# Altium PCB VIGIA_2_3.PcbDoc
Units mm, origin at the board's own origin, x right, y up, seen from the top; angles counter-clockwise.
Board outline 27 x 37 mm, 2 copper layers (Top Layer, Bottom Layer); 21 components, 24 nets, 82 pads, 0 vias.
Unrouted connection lines stored in the file: 2.
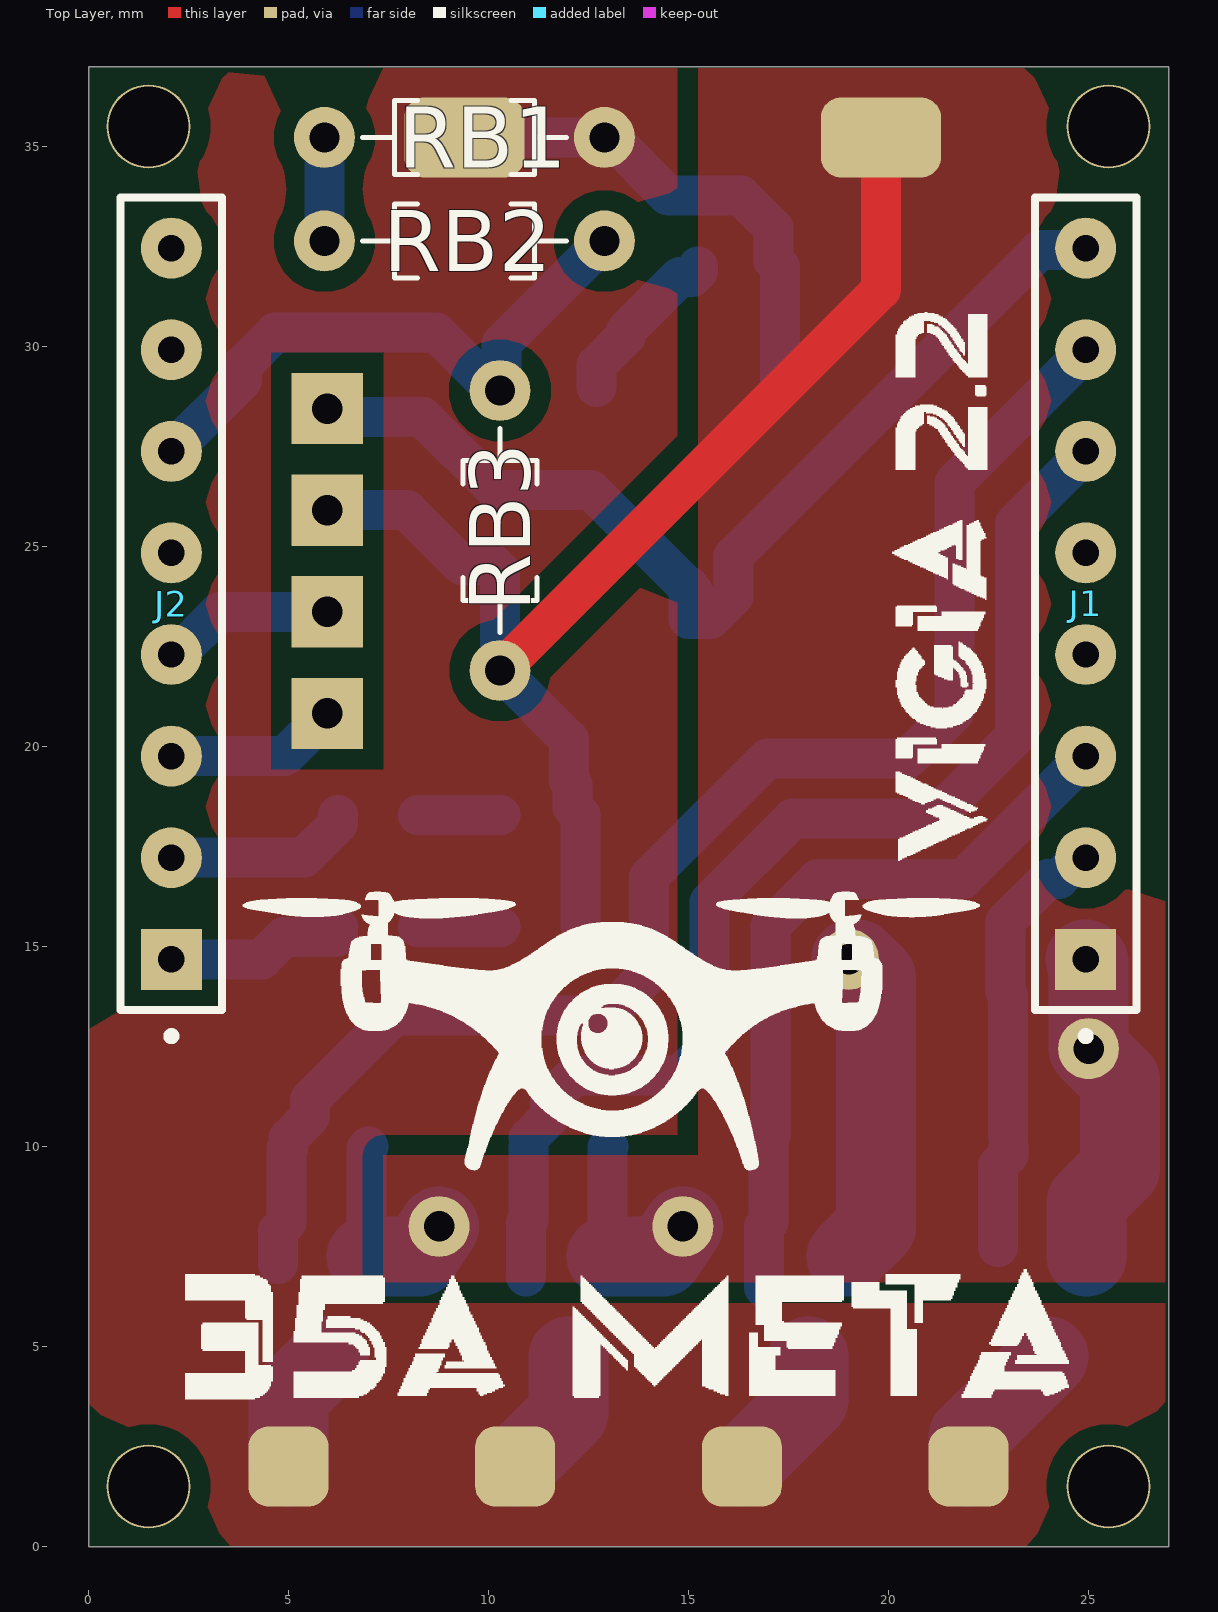
[diagram p0: Top Layer view]
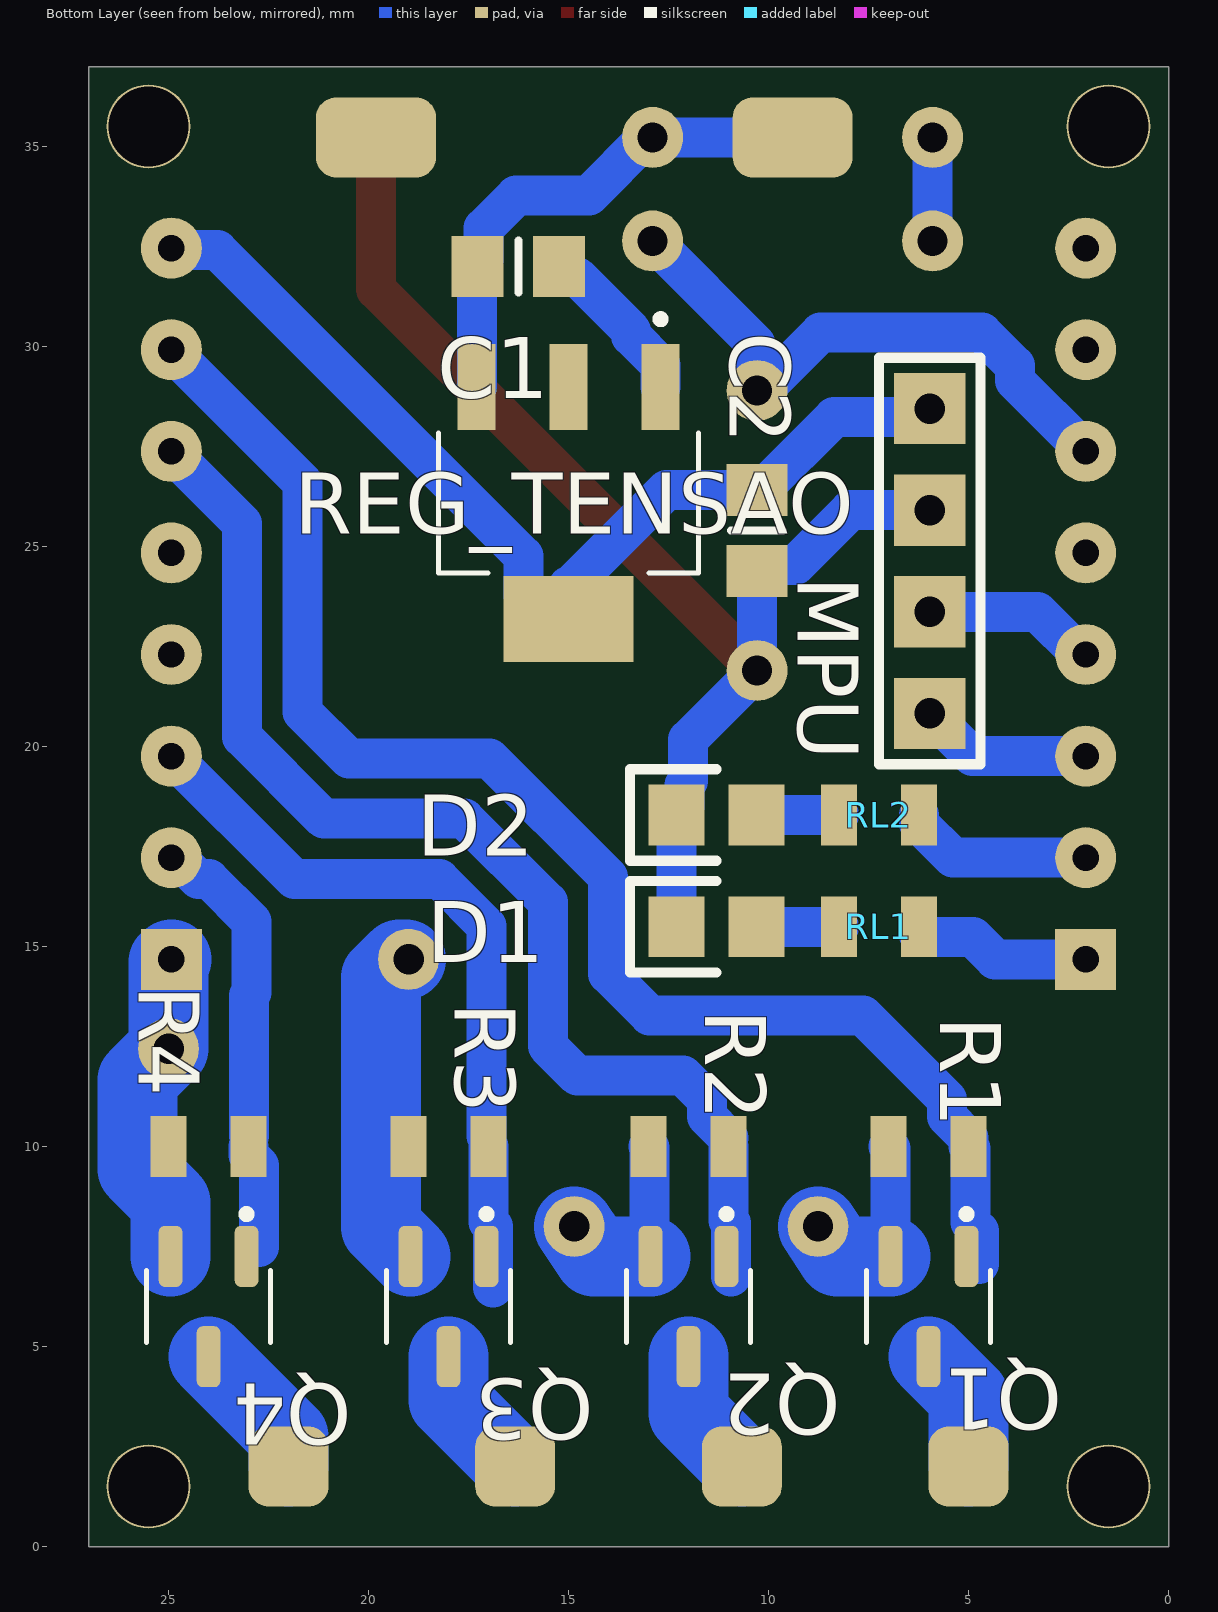
[diagram p1: Bottom Layer view, seen from below]

## Layer stack, top to bottom
Top Solder: solder mask 0.0102, Solder Resist, Dk 3.5
Top Layer: signal copper 0.0356
Dielectric 1: dielectric 0.32, FR-4, Dk 4.8
Bottom Layer: signal copper 0.0356
Bottom Solder: solder mask 0.0102, Solder Resist, Dk 3.5

## Board outline
0,0 0,37 27,37 27,0

## Design rules (kind name [scope] priority, off if disabled: settings)
Clearance [All] p1: gap=0.508 ignorepadtopadclearanceinfootprint=FALSE
PlaneConnect [All] p1: planeconnectstyle=Direct reliefexpansion=0.508 reliefentries=4 reliefconductorwidth=0.254 reliefairgap=0.254
PolygonConnect [All] p1: connectstyle=Direct reliefconductorwidth=0.254 reliefentries=4 polygonreliefangle="90 Angle" airgapwidth=0.254
RoutingVias [All] p1: holewidth=0.711 width=1.27 viastyle="Through Hole" minholewidth=0.711 minwidth=1.27 maxholewidth=0.711 maxwidth=1.27
SolderMaskExpansion [All] p1: expansion=0.102 istentingtop=FALSE
SupplyNets "Schematic Supply Nets" [InNet('GND')] p1: voltage=0.000
Width [All] p1: maxlimit=3 minlimit=1 preferedwidth=2 minimp=50.000000 maximp=50.000000 favimp=50.000000
29 further rules are at their usual default settings.

## Components (designator, comment, footprint, x,y, rotation, side; value= is the part's Value field where it differs from the comment)
C1 "CAP" "CAP 0805" 16.256,32.004 r0 bottom
C2 "CAP" "CAP 0805" 10.287,25.4 r90 bottom
D1 "DBGLED1" "LED 0805" 11.303,15.494 r0 bottom
D2 "DBGLED2" "LED 0805" 11.303,18.288 r0 bottom
J1 "GESP1" SAMTEC_SS-108-T-2 24.93,14.68 r270 top
J2 "GESP2" SAMTEC_SS-108-T-2 2.07,14.68 r270 top
MPU "CONECTOR_4PIN" CON4 5.969,28.448 r270 bottom (schematic designator MPU_6050)
Q1 "AO3400A" SOT95P280X125-3N 6,6 r270 bottom
Q2 "AO3400A" SOT95P280X125-3N 12,6 r270 bottom
Q3 "AO3400A" SOT95P280X125-3N 18,6 r270 bottom
Q4 "AO3400A" SOT95P280X125-3N 24,6 r270 bottom
R1 "RESISTOR" "RES 0805" 6,10 r180 bottom value=10k
R2 "RESISTOR" "RES 0805" 12,10 r180 bottom value=10k
R3 "RESISTOR" "RES 0805" 18,10 r180 bottom value=10k
R4 "RESISTOR" "RES 0805" 24,10 r180 bottom value=10k
RB1 "820K" RESAD700W45L350D185 9.398,35.227 r0 top
RB2 "82 Ohms" RESAD700W45L350D185 9.398,32.639 r0 top
RB3 "3M3" RESAD700W45L350D185 10.287,25.4 r90 top
REG_TENSAO "TLV1117LV33" VREG_TLV1117LV33DCYR 15,26.083 r270 bottom
RL1 "RESISTOR" "RES 0805" 7.239,15.494 r0 bottom value=100
RL2 "RESISTOR" "RES 0805" 7.239,18.288 r0 bottom value=100

## Footprints (in the part's own frame and the unit in brackets; to place one, negate y for a bottom-side part, rotate by r counter-clockwise, add the part's x,y. Pads: shape width x height; smd on the part's side, far side on the other; paste and mask are expansions set on the pad)
"CAP 0805" [mil] "0805"
  rect 51.18x60 smd: 1(-40,0) 2(40,0)
  silkscreen extent 0,-26 0,26, body extent -41,-24 38,23, height 35
CON4 [mil]
  rect 70x70 hole 30: 1(0,0) 2(100,0) 3(200,0) 4(300,0)
  silkscreen extent -50,-50 350,50, body extent -50,-47 343,45, height 519
"LED 0805" [mm] "0805"
  rect 1.4x1.524 smd: 1(-1,0) 2(1,0)
  silkscreen extent 0,-1.14 2.16,1.14, body extent -1.03,-0.4 1.03,0.51, height 0.85
"RES 0805" [mm] "0805 (1/8W)"
  rect 0.9x1.524 smd: 1(-1,0) 2(1,0)
  body extent -1.02,-0.63 0.95,0.6, height 0.48
RESAD700W45L350D185 [mm]
  round 1.524 hole 0.75: 1(-3.5,0) 2(3.5,0)
  silkscreen extent -2.55,-0.92 2.55,0.92, body extent -3.72,-0.92 3.72,0.92, height 1.84
SAMTEC_SS-108-T-2 [mil]
  rect 60x60 hole 25.98: 01(0,0)
  round 60 hole 25.98: 02(-100,0) 03(-200,0) 04(-300,0) 05(-400,0) 06(-500,0) 07(-600,0) 08(-700,0)
  silkscreen extent -750,-50 80,50
SOT95P280X125-3N [mm]
  rrect50% 1.524x0.59 smd: 1(-1.255,0.95) 2(-1.255,-0.95) 3(1.255,0)
  silkscreen extent -2.41,-1.55 0.9,1.55, body extent -1.4,-1.45 1.4,1.45, height 1.25
VREG_TLV1117LV33DCYR [mm]
  rect 2.15x0.95 smd: 1(-2.9,2.3) 2(-2.9,0) 3(-2.9,-2.3)
  rect 2.15x3.25 smd: 4(2.9,0)
  silkscreen extent -4.7,-3.25 1.75,3.25, body extent -3.5,-3.25 3.5,3.25, height 1.8

## Part data
C1 C2: library part "CAP. CERÂMICO", "Capacitor", Criado em=26/06/2012, Criador por="Luigi Eduardo", Pertence a=Trincabotz, Valor=10nF
D1 D2: library part LED
J1 J2: library part SS-108-T-2, "SS Series .100 Single Row Screw Machine Socket Strip", Package=None, Availability=Bad, MF=Samtec, MP=SS-108-T-2, Price=None, SnapEDA_Link=https://www.snapeda.com/parts/SS-108-T-2/Samtec/view-part/3323909/?ref=snap
  J2: Check_prices=SLA
Q1 Q2 Q3 Q4: "N-Channel 30 V 5.7A (Ta) 1.4W (Ta) Surface Mount SOT-23-3", Package="SOT-23 Alpha &amp; Omega Semiconductor Inc.", Check_prices=https://www.snapeda.com/parts/AO3400A/Alpha/view-part/?ref=eda, MF="Alpha & Omega Semiconductor", MP=AO3400A, SnapEDA_Link=https://www.snapeda.com/parts/AO3400A/Alpha/view-part/?ref=snap
R1 R2 R3 R4 RL1 RL2: "Resistor"
RB1 RB2 RB3: library part 3-1623927-1, "1 MOhms Â±5% 0.25W, 1/4W Through Hole Resistor Axial - Carbon Film", Package=None, Check_prices=https://www.snapeda.com/parts/3-1623927-1/TE+Connectivity/view-part/?ref=eda, MF="TE Connectivity", MP=3-1623927-1, SnapEDA_Link=https://www.snapeda.com/parts/3-1623927-1/TE+Connectivity/view-part/?ref=snap
REG_TENSAO: library part TLV1117LV33DCYR, "1-A, low-dropout voltage regulator", Package="SOT-223-4 Texas Instruments", Check_prices=https://www.snapeda.com/parts/TLV1117LV33DCYR/Texas+Instruments/view-part/?ref=eda, MF="Texas Instruments", MP=TLV1117LV33DCYR, SnapEDA_Link=https://www.snapeda.com/parts/TLV1117LV33DCYR/Texas+Instruments/view-part/?ref=snap

## Free pads (board coordinates)
  round 2.1 hole 2: 7(25.5,1.5) 8(1.5,1.5) 9(25.5,35.5) 10(1.5,35.5)
  rrect50% 2x2 smd far side: 11(5,2) 11(10.667,2) 11(16.333,2) 11(22,2)
  rrect50% 2x2 smd: 11(5,2) 11(10.667,2) 11(16.333,2) 11(22,2)
  rrect50% 3x2 smd far side: 12(19.812,35.227) 13(9.398,35.227)
  rrect50% 3x2 smd: 12(19.812,35.227) 13(9.398,35.227)
  round 1.524 hole 0.762: 17(14.859,8.001) 19(19,14.68) 20(25,12.446) 22(8.763,8.001)

## Nets (pads, with @x,y where several pads share a name; then routed paths per layer and width w, separated by ;. In a path a pad name is that pad's centre, name@x,y a point inside that pad or via, vN(x,y) a via of type N, cw(c..) or ccw(c..) an arc to the next point about the centre after c; other vN are vias at no path point)
3.3V: C2.2 J1.08 MPU.1 REG_TENSAO.4 | length 26.3
  Bottom Layer w1: MPU.1 6.184,28.233 8.358,28.233 10.175,26.416 C2.2 12.549,26.416 15.131,23.834 REG_TENSAO.4@15.131,23.758 ; REG_TENSAO.4@15,24.017 REG_TENSAO.4 15.55,23.183 16.125,23.758 16.125,24.761 23.778,32.414 24.884,32.414 J1.08
CTRLM1: J1.07 Q1.1 R1.2 | length 36.4
  Bottom Layer w1: 4.742,7.058 4.742,7.887 4.95,8.095 4.95,9.95 R1.2 5,10.212 5.542,10.754 5.542,11.18 7.64,13.278 12.975,13.278 14.011,14.314 14.011,16.738 16.977,19.704 20.492,19.704 21.652,20.864 21.652,26.605 24.93,29.883 J1.07
CTRLM2: J1.06 Q2.1 R2.2 | length 29.8
  Bottom Layer w1: Q2.1@10.942,6.753 10.942,8.087 11,8.145 R2.2 ; R2.2@11,10.212 11.542,10.754 11.542,11.18 12.132,11.77 14.781,11.77 15.519,12.508 15.519,16.113 17.602,18.196 21.117,18.196 23.16,20.239 23.16,25.573 24.93,27.343 J1.06
CTRLM3: J1.03 Q3.1 R3.2 | length 18.5
  Bottom Layer w1: 16.891,6.477 16.891,8.001 17,8.11 R3.2 ; R3.2@17.05,10.262 17.05,15.512 18.226,16.688 21.856,16.688 24.928,19.76 J1.03
CTRLM4: J1.02 Q4.1 R4.2 | length 10.7
  Bottom Layer w1: 22.733,7.493 22.733,9.521 23,9.788 R4.2 ; R4.2@22.992,10.262 22.992,13.778 22.922,13.848 22.922,15.622 23.988,16.688 24.256,16.688 24.788,17.22 J1.02
GND: C1.1 C2.1 D1.2 D2.2 J1.01 MPU.2 pad.12 pad.17 pad.19 pad.20 pad.22 Q1.2 Q2.2 Q3.2 Q4.2 R1.1 R2.1 R3.1 R4.1 RB3.1 REG_TENSAO.1 | length 62.5
  Top Layer w1: RB3.1 19.812,31.425 pad.12@19.812,35.227
  Bottom Layer w1: MPU.2 7.957,25.908 9.331,24.534 10.137,24.534 C2.1 RB3.1 12.011,20.176 12.011,19.136 12.103,19.044 12.103,18.488 D2.2 D1.2 ; Q1.2 6.95,9.517 6.95,9.95 R1.1 ; REG_TENSAO.1 12.7,29.533 13.432,30.265 13.432,30.391 14.783,31.742 15.09,31.742 15.24,31.892 C1.1 ; Q2.2 12.975,7.28 12.975,9.975 R2.1
  Bottom Layer w2: Q1.2 8.271,7.255 pad.22 ; Q2.2 14.367,7.255 pad.17 ; Q3.2 19.685,7.99 19.685,14.224 19.229,14.68 pad.19@19.058,14.68 ; J1.01 25,14.61 pad.20 25.781,11.665 25.781,9.436 24.95,8.605 Q4.2
LEDDBG1: J2.01 RL1.1 | length 4.6
  Bottom Layer w1: J2.01 4.332,14.68 4.884,15.232 6.189,15.232 6.239,15.282 RL1.1
LEDDBG2: J2.02 RL2.1 | length 4.7
  Bottom Layer w1: J2.02 5.383,17.22 6.239,18.076 RL2.1
MBAT: J2.06 RB2.2 RB3.2 | length 15.1
  Bottom Layer w1: J2.06 3.84,29.15 3.84,29.523 4.662,30.345 8.7,30.345 10.145,28.9 RB3.2 10.322,28.935 10.322,30.063 RB2.2
NetD1_1: D1.1 RL1.2 | length 2.1
  Bottom Layer w1: RL1.2 D1.1
NetD2_1: D2.1 RL2.2 | length 2.1
  Bottom Layer w1: RL2.2 D2.1
NetJ1_04: J1.04
NetJ1_05: J1.05
NetJ2_05: J2.05
NetJ2_07: J2.07
NetJ2_08: J2.08
NetM1_1: pad.11@5,2 Q1.3 | length 3.2
  Bottom Layer w2: pad.11@5,2 5,3.745 Q1.3
NetM2_1: pad.11@10.667,2 Q2.3 | length 3.3
  Bottom Layer w2: pad.11@10.667,2 12,3.333 Q2.3
NetM3_1: pad.11@16.333,2 Q3.3 | length 3.4
  Bottom Layer w2: pad.11@16.333,2 18,3.667 Q3.3
NetM4_1: pad.11@22,2 Q4.3 | length 3.6
  Bottom Layer w2: pad.11@22,2 22,2.745 Q4.3
NetRB1_1: RB1.1 RB2.1 | length 2.6
  Bottom Layer w1: RB2.1 RB1.1
SCL: J2.04 MPU.3 | length 4.3
  Bottom Layer w1: J2.04 2.212,22.3 3.28,23.368 MPU.3
SDA: J2.03 MPU.4 | length 4.3
  Bottom Layer w1: J2.03 4.901,19.76 MPU.4
VBAT: C1.2 pad.11@5,2 pad.11@10.667,2 pad.11@16.333,2 pad.11@22,2 pad.13 RB1.2 REG_TENSAO.3 | length 12.7
  Bottom Layer w1: pad.13@9.398,35.227 RB1.2 13.04,35.227 14.493,33.774 16.308,33.774 17.122,32.96 17.122,32.154 C1.2 17.286,31.99 17.286,28.997 REG_TENSAO.3
pads on no net: REG_TENSAO.2

## Polygon pours and split planes (outlines as drawn)
VBAT on Top Layer "VBAT_L01_P001" (solid, pour order 1): 0,36.957 15.24,36.957 15.24,9.779 7.366,9.779 7.366,6.604 26.924,6.604 26.924,0 0,0
GND on Top Layer "GND_L01_P000" (solid, pour order 0): 15.24,36.957 15.24,9.779 7.366,9.779 7.366,6.604 26.924,6.604 26.924,36.957

## Silkscreen, mask and mechanical layers (free items; w line width, h text height)
Top Overlay:
  drawing of 33 lines, arcs and shapes, not listed